# Altium PCB 核心板.PcbDoc (part 1 of 3)
Units mm, origin at the board's own origin, x right, y up, seen from the top; angles counter-clockwise.
Board outline 93.66 x 72.54 mm, 2 copper layers (Top Layer, Bottom Layer); 96 components, 149 nets, 537 pads, 213 vias.
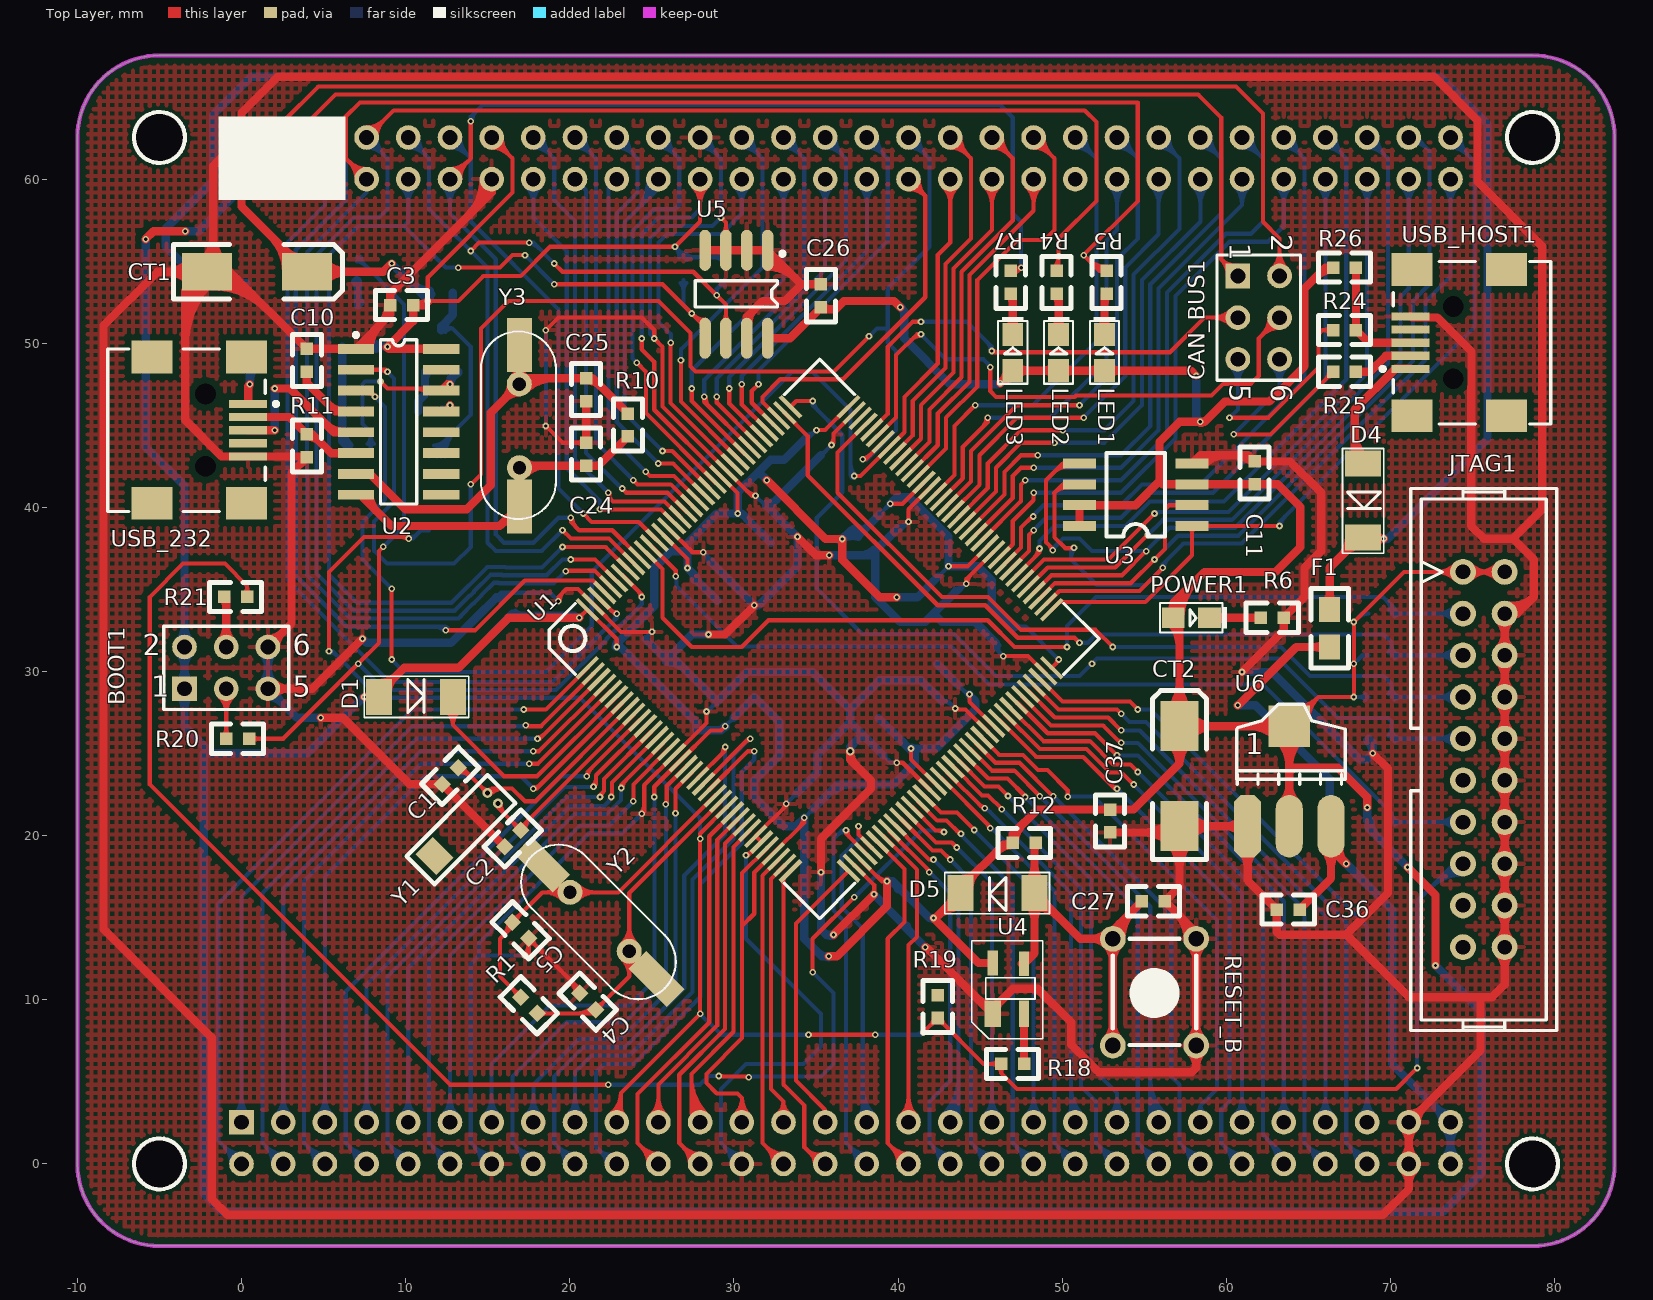
[diagram p0: Top Layer view]
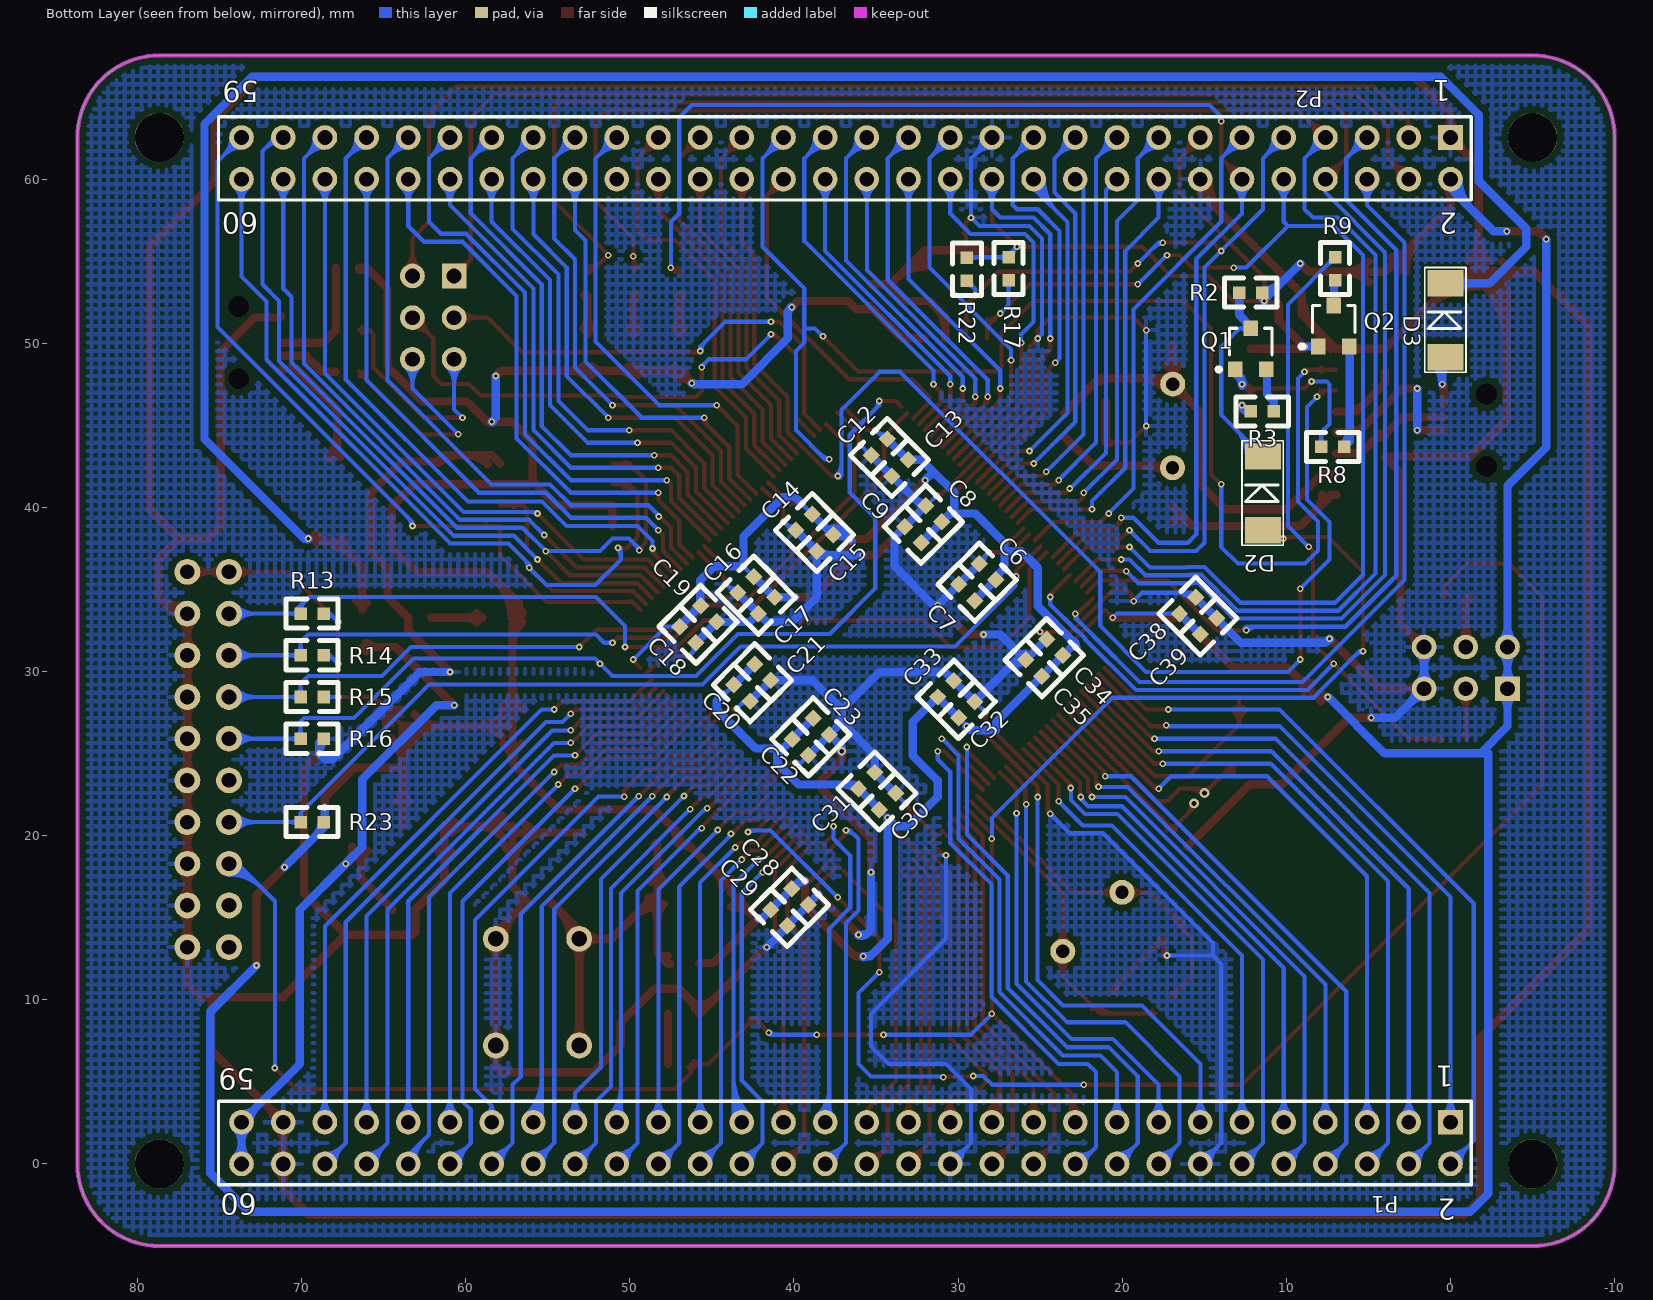
[diagram p1: Bottom Layer view, seen from below]

## Layer stack, top to bottom
Top Layer: signal copper 0.0356
Dielectric: dielectric 0.32, FR-4, Dk 4.8
Bottom Layer: signal copper 0.0356

## Board outline
-10,0 ccw(c-5,0) -5,-5 78.66,-5 ccw(c78.66,0) 83.66,0 83.66,62.54 ccw(c78.66,62.54) 78.66,67.54 -5,67.54 ccw(c-5,62.54) -10,62.54

## Design rules (kind name [scope] priority, off if disabled: settings)
Clearance Clearance_1 [Inpolygon] p1: gap=0.381
Clearance [All] p2: gap=0.229
HoleSize [All] p1: absolutevalues=TRUE maxlimit=5 minlimit=0.025 maxpercent=80.000 minpercent=20.000
MinimumSolderMaskSliver [All] p1: minsoldermaskwidth=0
PolygonConnect [All] p1: connectstyle=Relief reliefconductorwidth=0.254 reliefentries=4 polygonreliefangle="90 Angle"
RoutingVias [All] p1: holewidth=0.203 width=0.406 viastyle="Through Hole" minholewidth=0.203 minwidth=0.406 maxholewidth=0.203 maxwidth=0.406
SilkToSilkClearance [All] p1: silktosilkclearance=0
SilkscreenOverComponentPads [All] p1: minsilkscreentomaskgap=0
SolderMaskExpansion [All] p1: expansion=0.102
TestPointUsage [All] p1: valid=0 allowmultiple=FALSE
Testpoint [All] p1: side=3 testpointundercomponent=TRUE minsize=1.016 maxsize=2.54 preferedsize=1.524 minholesize=0 maxholesize=1.016 preferedholesize=0.813 testpointgrid=0.025 style=297 order=0123456789
Width [All] p1: maxlimit=1 minlimit=0.254 preferedwidth=0.254
20 further rules are at their usual default settings.

## Components (designator, comment, footprint, x,y, rotation, side; value= is the part's Value field where it differs from the comment)
BOOT1 "Header 3X2" HDR2X3 -3.472,28.956 r0 top
C1 "贴片电容10pF" 0603 13.208,24.13 r225 top
C2 "贴片电容10pF" 0603 17.018,20.32 r225 top
C3 "电容(贴片)" 0603 9.06,52.324 r0 top
C4 "贴片电容22pF" 0603 21.59,9.398 r135 top
C5 "贴片电容22pF" 0603 16.51,14.732 r315 top
C6 "贴片电容 1uF" 0603 28.702,36.576 r225 bottom
C7 "贴片电容10nF" 0603 29.972,35.306 r225 bottom
C8 "贴片电容10nF" 0603 30.988,39.116 r45 bottom
C9 "贴片电容 1uF" 0603 32.258,37.846 r45 bottom
C10 "电容(贴片)" 0603 3.98,48.26 r90 top
C11 "电容(贴片)" 0603 61.722,41.402 r90 top
C12 "电容(贴片)" 0603 35.306,43.18 r135 bottom
C13 "电容(贴片)" 0603 34.036,41.91 r135 bottom
C14 "电容(贴片)" 0603 39.878,38.608 r135 bottom
C15 "电容(贴片)" 0603 38.608,37.338 r135 bottom
C16 "电容(贴片)" 0603 43.434,34.798 r135 bottom
C17 "电容(贴片)" 0603 42.164,33.528 r135 bottom
C18 "电容(贴片)" 0603 45.974,31.75 r45 bottom
C19 "电容(贴片)" 0603 44.704,33.02 r45 bottom
C20 "电容(贴片)" 0603 42.672,28.194 r45 bottom
C21 "电容(贴片)" 0603 41.402,29.464 r45 bottom
C22 "电容(贴片)" 0603 39.116,24.892 r45 bottom
C23 "电容(贴片)" 0603 37.846,26.162 r45 bottom
C24 "电容(贴片)" 0603 20.998,43.942 r270 top
C25 "电容(贴片)" 0603 20.998,46.482 r90 top
C26 "电容(贴片)" 0603 35.306,53.594 r270 top
C27 "电容(贴片)" 0603 54.864,16.002 r0 top
C28 "电容(贴片)" 0603 40.132,16.764 r225 bottom
C29 "电容(贴片)" 0603 41.402,15.494 r225 bottom
C30 "电容(贴片)" 0603 34.798,21.59 r135 bottom
C31 "电容(贴片)" 0603 36.068,22.86 r135 bottom
C32 "电容(贴片)" 0603 29.972,27.178 r135 bottom
C33 "电容(贴片)" 0603 31.242,28.448 r135 bottom
C34 "电容(贴片)" 0603 23.622,30.988 r45 bottom
C35 "电容(贴片)" 0603 24.892,29.718 r45 bottom
C36 "电容(贴片)" 0603 63.076,15.494 r0 top
C37 "电容(贴片)" 0603 52.916,21.59 r270 top
C38 "电容(贴片)" 0603 16.51,33.528 r135 bottom
C39 "电容(贴片)" 0603 15.24,32.258 r135 bottom
CAN_BUS1 "Header 3X2" HDR2X3 60.706,54.102 r270 top
CT1 "钽电容(贴片)" 6032 3.98,54.356 r0 top
CT2 "钽电容(贴片)" 6032 57.15,26.67 r90 top
D1 "二极管(贴片)" D1206 8.382,28.448 r0 top
D2 "二极管(贴片)" D1206 11.43,38.608 r90 bottom
D3 "二极管(贴片)" D1206 0.3,49.154 r90 bottom
D4 "二极管(贴片)" D1206 68.326,42.672 r270 top
D5 "二极管(贴片)" D1206 48.312,16.51 r180 top
F1 "0.5A" 0805 66.294,31.496 r90 top
JTAG1 "JTAG" JTAG_20 75.692,24.638 r270 top
LED1 "二极管(贴片发光绿色)" LED-0805 52.705,48.311 r90 top
LED2 "二极管(贴片发光绿色)" LED-0805 49.911,48.311 r90 top
LED3 "二极管(贴片发光绿色)" LED-0805 47.117,48.311 r90 top
P1 "Header 30X2" HDR2X30 0,2.54 r0 bottom
P2 "Header 30X2" HDR2X30 0,62.54 r0 bottom
POWER1 "二极管(贴片发光绿色)" LED-0805 56.744,33.147 r0 top
Q1 "S8050" sot-23 12.168,49.657 r180 bottom
Q2 "S8550" sot-23 7.112,51.054 r180 bottom
R1 "贴片电阻 1M" 0603 17.018,10.16 r315 top
R2 "电阻(贴片)" 0603 12.87,53.086 r180 bottom
R3 "电阻(贴片)" 0603 12.168,45.847 r180 bottom
R4 "电阻(贴片)" 0603 49.657,54.407 r270 top
R5 "电阻(贴片)" 0603 52.705,54.407 r270 top
R6 "电阻(贴片)" 0603 63.5,33.274 r180 top
R7 "电阻(贴片)" 0603 46.863,54.407 r270 top
R8 "电阻(贴片)" 0603 7.874,43.688 r180 bottom
R9 "电阻(贴片)" 0603 7.028,53.848 r90 bottom
R10 "电阻(贴片)" 0603 23.538,45.72 r270 top
R11 "电阻(贴片)" 0603 3.98,44.45 r270 top
R12 "电阻(贴片)" 0603 46.99,19.558 r0 top
R13 "电阻(贴片)" 0603 68.664,33.528 r0 bottom
R14 "电阻(贴片)" 0603 68.664,30.988 r0 bottom
R15 "电阻(贴片)" 0603 68.664,28.448 r0 bottom
R16 "电阻(贴片)" 0603 68.664,25.908 r0 bottom
R17 "电阻(贴片)" 0603 26.924,53.848 r90 bottom
R18 "电阻(贴片)" 0603 46.28,6.096 r0 top
R19 "电阻(贴片)" 0603 42.418,8.89 r90 top
R20 "电阻(贴片)" 0603 -0.932,25.908 r0 top
R21 "电阻(贴片)" 0603 0.338,34.544 r180 top
R22 "电阻(贴片)" 0603 29.464,53.81 r90 bottom
R23 "电阻(贴片)" 0603 68.664,20.828 r0 bottom
R24 "电阻(贴片)" 0603 67.902,50.8 r180 top
R25 "电阻(贴片)" 0603 67.902,48.26 r180 top
R26 "电阻(贴片)" 0603 67.902,54.61 r180 top
RESET_B "KEY_M" KEY_M 58.166,13.716 r270 top
U1 "STM32F103ZET6" LQFP144 21.082,30.226 r45 top
U2 "CH340G" SOP16M 9.568,45.212 r270 top
U3 "W25Q128" SOIC-8 57.912,38.862 r180 top
U4 "集成电路贴片" MAX811T 45.772,9.144 r90 top
U5 "集成电路贴片" SOP8 32.004,55.626 r270 top
U6 "AMS1117-3.3" AMS1117 61.298,20.574 r0 top
USB_232 "USB" USB/SM0.8-6H5 -7.45,44.704 r180 top
USB_HOST1 "USB" USB/SM0.8-6H5 79.078,50.038 r0 top
Y1 "晶体(贴片)" 32.768khz 14.986,22.606 r225 top
Y2 "晶体(贴片)" CRYSTAL_SMD 23.622,12.954 r45 top
Y3 "晶体(贴片)" CRYSTAL_SMD 16.934,42.418 r0 top

## Footprints (in the part's own frame and the unit in brackets; to place one, negate y for a bottom-side part, rotate by r counter-clockwise, add the part's x,y. Pads: shape width x height; smd on the part's side, far side on the other; paste and mask are expansions set on the pad)
32.768khz [mm]
  round 0.6 hole 0.3: 1(0,0) 2(0,0.9)
  rect 1.5x1.8 smd: 3(5,0.45)
  silkscreen extent -0.76,-0.76 6.22,1.65
0603 [mil]
  rect 30x30 smd: 1(0,0) 2(55,0)
  silkscreen extent -35,-35 90,35
0805 [mil]
  rect 60x50 smd: 1(0,-0.06) 2(90,-0.06)
  silkscreen extent -50,-45 140,45
6032 [mil]
  rect 120x90 smd: 1(0,0) 2(-240,0)
  silkscreen extent -320,-65 85,65
AMS1117 [mil]
  oct 65x150 smd: 1(0.03,-0.06)
  oval 65x150 smd: 2(100.03,-0.06) 3(200.03,-0.06)
  rect 100x100 smd: 4(100.03,239.94)
  silkscreen extent -26,100 234,293
CRYSTAL_SMD [mil]
  rect 60x130 smd: 1(-0.46,-93.11) 2(-0.46,294.61)
  round 60 hole 32: 1(0,0) 2(-0.43,200.43)
  silkscreen extent -93,-123 88,327
D1206 [mm]
  rect 1.6x2.2 smd: 1(0,0) 2(4.5,0)
  silkscreen extent -0.91,-1.24 5.46,1.27
HDR2X3 [mm] "Connector; Header; 3x2 Position"
  rect 1.5x1.5 hole 0.9: 1(0,0)
  round 1.5 hole 0.9: 2(0,2.54) 3(2.54,0) 4(2.54,2.54) 5(5.08,0) 6(5.08,2.54)
  silkscreen extent -1.27,-1.27 6.35,3.81
HDR2X30 [mm] "Connector; Header; 30x2 Position"
  rect 1.5x1.5 hole 0.9: 1(0,0)
  round 1.5 hole 0.9: 2(0,2.54) 3(2.54,0) 4(2.54,2.54) 5(5.08,0) 6(5.08,2.54) 7(7.62,0) 8(7.62,2.54) 9(10.16,0) 10(10.16,2.54) 11(12.7,0) 12(12.7,2.54) 13(15.24,0) 14(15.24,2.54) 15(17.78,0) 16(17.78,2.54) 17(20.32,0) 18(20.32,2.54) 19(22.86,0) 20(22.86,2.54) 21(25.4,0) 22(25.4,2.54) 23(27.94,0) 24(27.94,2.54) 25(30.48,0) 26(30.48,2.54) 27(33.02,0) 28(33.02,2.54) 29(35.56,0) 30(35.56,2.54) 31(38.1,0) 32(38.1,2.54) 33(40.64,0) 34(40.64,2.54) 35(43.18,0) 36(43.18,2.54) 37(45.72,0) 38(45.72,2.54) 39(48.26,0) 40(48.26,2.54) 41(50.8,0) 42(50.8,2.54) 43(53.34,0) 44(53.34,2.54) 45(55.88,0) 46(55.88,2.54) 47(58.42,0) 48(58.42,2.54) 49(60.96,0) 50(60.96,2.54) 51(63.5,0) 52(63.5,2.54) 53(66.04,0) 54(66.04,2.54) 55(68.58,0) 56(68.58,2.54) 57(71.12,0) 58(71.12,2.54) 59(73.66,0) 60(73.66,2.54)
  silkscreen extent -1.27,-1.27 75.06,3.81
JTAG_20 [mil]
  round 62 hole 35: 1(-450,-50) 2(-450,50) 3(-350,-50) 4(-350,50) 5(-250,-50) 6(-250,50) 7(-150,-50) 8(-150,50) 9(-50,-50) 10(-50,50) 11(50,-50) 12(50,50) 13(150,-50) 14(150,50) 15(250,-50) 16(250,50) 17(350,-50) 18(350,50) 19(450,-50) 20(450,50)
  silkscreen extent -650,-175 650,175
KEY_M [mil]
  round 62 hole 38: 1(0,0) 1(255.91,0) 2(0,-200) 2(255.91,-200)
  silkscreen extent 0,-200 255,0
LED-0805 [mil]
  rect 55.12x50 smd: 1(0.99,5) 2(88,5)
  silkscreen extent -31,-30 130,40
LQFP144 [mm]
  rect 1.8x0.254 smd: 1(-0.009,0.001) 2(-0.009,-0.499) 3(-0.009,-0.999) 4(-0.009,-1.499) 5(-0.009,-1.999) 6(-0.009,-2.499) 7(-0.009,-2.999) 8(-0.009,-3.499) 9(-0.009,-3.999) 10(-0.009,-4.499) 11(-0.009,-4.999) 12(-0.009,-5.499) 13(-0.009,-5.999) 14(-0.009,-6.499) 15(-0.009,-6.999) 16(-0.009,-7.499) 17(-0.009,-7.999) 18(-0.009,-8.499) 19(-0.009,-8.999) 20(-0.009,-9.499) 21(-0.009,-9.999) 22(-0.009,-10.499) 23(-0.009,-10.999) 24(-0.009,-11.499) 25(-0.009,-11.999) 26(-0.009,-12.499) 27(-0.009,-12.999) 28(-0.009,-13.499) 29(-0.009,-13.999) 30(-0.009,-14.499) 31(-0.009,-14.999) 32(-0.009,-15.499) 33(-0.009,-15.999) 34(-0.009,-16.499) 35(-0.009,-16.999) 36(-0.009,-17.499) 73(22.491,-17.499) 74(22.491,-16.999) 75(22.491,-16.499) 76(22.491,-15.999) 77(22.491,-15.499) 78(22.491,-14.999) 79(22.491,-14.499) 80(22.491,-13.999) 81(22.491,-13.499) 82(22.491,-12.999) 83(22.491,-12.499) 84(22.491,-11.999) 85(22.491,-11.499) 86(22.491,-10.999) 87(22.491,-10.499) 88(22.491,-9.999) 89(22.491,-9.499) 90(22.491,-8.999) 91(22.491,-8.499) 92(22.491,-7.999) 93(22.491,-7.499) 94(22.491,-6.999) 95(22.491,-6.499) 96(22.491,-5.999) 97(22.491,-5.499) 98(22.491,-4.999) 99(22.491,-4.499) 100(22.491,-3.999) 101(22.491,-3.499) 102(22.491,-2.999) 103(22.491,-2.499) 104(22.491,-1.999) 105(22.491,-1.499) 106(22.491,-0.999) 107(22.491,-0.499) 108(22.491,0.001)
  rect 0.254x1.8 smd: 37(2.491,-19.999) 38(2.991,-19.999) 39(3.491,-19.999) 40(3.991,-19.999) 41(4.491,-19.999) 42(4.991,-19.999) 43(5.491,-19.999) 44(5.991,-19.999) 45(6.491,-19.999) 46(6.991,-19.999) 47(7.491,-19.999) 48(7.991,-19.999) 49(8.491,-19.999) 50(8.991,-19.999) 51(9.491,-19.999) 52(9.991,-19.999) 53(10.491,-19.999) 54(10.991,-19.999) 55(11.491,-19.999) 56(11.991,-19.999) 57(12.491,-19.999) 58(12.991,-19.999) 59(13.491,-19.999) 60(13.991,-19.999) 61(14.491,-19.999) 62(14.991,-19.999) 63(15.491,-19.999) 64(15.991,-19.999) 65(16.491,-19.999) 66(16.991,-19.999) 67(17.491,-19.999) 68(17.991,-19.999) 69(18.491,-19.999) 70(18.991,-19.999) 71(19.491,-19.999) 72(19.991,-19.999) 109(19.991,2.501) 110(19.491,2.501) 111(18.991,2.501) 112(18.491,2.501) 113(17.991,2.501) 114(17.491,2.501) 115(16.991,2.501) 116(16.491,2.501) 117(15.991,2.501) 118(15.491,2.501) 119(14.991,2.501) 120(14.491,2.501) 121(13.991,2.501) 122(13.491,2.501) 123(12.991,2.501) 124(12.491,2.501) 125(11.991,2.501) 126(11.491,2.501) 127(10.991,2.501) 128(10.491,2.501) 129(9.991,2.501) 130(9.491,2.501) 131(8.991,2.501) 132(8.491,2.501) 133(7.991,2.501) 134(7.491,2.501) 135(6.991,2.501) 136(6.491,2.501) 137(5.991,2.501) 138(5.491,2.501) 139(4.991,2.501) 140(4.491,2.501) 141(3.991,2.501) 142(3.491,2.501) 143(2.991,2.501) 144(2.491,2.501)
  silkscreen extent -0.81,-20.8 23.29,3.3
MAX811T [mil]
  rect 63x40 smd: 1(0,0)
  rect 63x25 smd: 2(0,-75)
  rect 59.05x25 smd: 3(120,-75) 4(122.05,0)
  silkscreen extent -60,-120 175,50
SOIC-8 [mil]
  rect 80x24 smd: 1(0,0) 2(0,-50.06) 3(0,-100.06) 4(0,-150.06) 5(270,-150) 6(270,-100) 7(270,-50) 8(270,0)
  silkscreen extent 65,-175 205,25
SOP8 [mm]
  oval 2.5x0.7 smd: 1(-0.037,0.051) 2(-0.037,-1.219) 3(-0.037,-2.489) 4(-0.037,-3.759) 5(5.32,-3.759) 6(5.32,-2.489) 7(5.32,-1.219) 8(5.32,0.051)
  silkscreen extent 0.04,-4.35 3.42,1.08
SOP16M [mm]
  rect 0.6x2.2 smd: 1(-4.445,-2.6) 2(-3.175,-2.6) 3(-1.905,-2.6) 4(-0.635,-2.6) 5(0.635,-2.6) 6(1.905,-2.6) 7(3.175,-2.6) 8(4.445,-2.6) 9(4.445,2.6) 10(3.175,2.6) 11(1.905,2.6) 12(0.635,2.6) 13(-0.635,2.6) 14(-1.905,2.6) 15(-3.175,2.6) 16(-4.445,2.6)
  silkscreen extent -5.42,-2.72 5,1.1
sot-23 [mm] "SOT-23; 3 Leads; Body 3.0 x 2.6 mm, inc. leads (LxW max)"
  rect 0.9x0.95 smd: 1(-0.95,-1.25) 2(0.95,-1.25) 3(0,1.25)
  silkscreen extent -2.08,-1.37 1.3,1.25
USB/SM0.8-6H5 [mm]
  rect 2.3x0.5 smd: 1(-7.85,-1.6) 2(-7.85,-0.8) 3(-7.85,0) 4(-7.85,0.8) 5(-7.85,1.6)
  rect 2.5x2 smd: 6(-7.75,4.45) 7(-1.996,4.45) 8(-7.75,-4.45) 9(-1.996,-4.45)
  round 0.6 hole 1.27 unplated: MH1(-5.25,2.2) MH2(-5.25,-2.2)
  silkscreen extent -9.68,-4.95 0.7,4.95

## Part data
BOOT1 CAN_BUS1: "Header, 3-Pin, Dual row"
C1 C2: library part Cap, "Capacitor 10pF"
C3 C10 C11 C12 C13 C14 C15 C16 C17 C18 C19 C20 C21 C22 C23 C28 C29 C30 C31 C32 C33 C34 C35 C36 C37 C38 C39: library part "CAP_0.1uF X7R 0603", "0603X7R104J160NT(0.1uF)"
C4 C5: library part Cap, "Capacitor 22pF"
C6 C9: library part Cap, "Capacitor 10uf"
C7 C8: library part Cap, "Capacitor 0.1uf"
C24 C25: library part "CAP_33pF COG 0603", "0603COG330J500NT(33pF)"
C26 C27: library part "CAP_10uF/10V Z5U 0603", "0603Z5U106J100NT(10uF/10V)"
CT1 CT2: library part "CAP TAN 100uF/10V/6032", "100uF/10V/6032封装"
D1 D2 D3 D4 D5: library part "DIODE 1N4148/1206", "1N4148/1206"
F1: library part "Fuse 1", "Fuse"
LED1 LED2 LED3 POWER1: library part "LED_GREEN 0805", "LED-0805"
P1 P2: "Header, 30-Pin, Dual row"
Q1: library part 2N3904, "NPN General Purpose Amplifier"
Q2: library part 2N3906, "PNP General Purpose Amplifier"
R1: library part Res3, "电阻"
R2 R3 R8 R9 R10 R11: library part "RES_1MΩ 5% 0603", "RS-03K-105±5%(1MΩ)"
R4 R5 R6 R7 R19 R24 R25 R26: library part "RES_1K  5% 0603", "RS-03K-102±5%(1KΩ)"
R12 R13 R14 R15 R16 R20 R21 R23: library part "RES_10K 5% 0603", "RS-03K-103±5%(10KΩ)"
R17 R22: library part "RES_1.5K  5% 0603", "RS-03K-152±5%(1.5KΩ)"
R18: library part "RES_470 5% 0603", "RS-03K-471±5%(470Ω)"
U2: "USB2UART"
U3: library part W25X16, "W25X16;SST25VF016;MX25L1605"
U4: library part "Power MAX811T", "MAX811T/SOT143  电源管理芯片"
U5: library part AT24C02A, "AT24C02/SOP08"
U6: library part AMS1117
USB_232 USB_HOST1: library part USB5
Y1: library part "CRYSTAL 12M HC-49SMD", "HC-49SMD/XTAL 32.768KHz"
Y2: library part "CRYSTAL 12M HC-49SMD", "HC-49SMD/8.000MHz"
Y3: library part "CRYSTAL 12M HC-49SMD", "HC-49SMD/12.000MHz"

## Free pads (board coordinates)
  round 3 hole 3: 0(-5,0) 0(-5,62.54) 0(78.66,0) 0(78.66,62.54)

## Via types
v1: diameter 0.406, hole 0.203, Top Layer to Bottom Layer, 212 vias
v2: diameter 0.508, hole 0.254, Top Layer to Bottom Layer, 1 vias

## Nets (pads, with @x,y where several pads share a name; then routed paths per layer and width w, separated by ;. In a path a pad name is that pad's centre, name@x,y a point inside that pad or via, vN(x,y) a via of type N, cw(c..) or ccw(c..) an arc to the next point about the centre after c; other vN are vias at no path point)
BOOT0: R9.2 R20.2 U1.138 | length 60.4
  Top Layer w0.254: R20.2@0.465,25.908 2.54,25.908 v1(7.112,30.48) 8.382,31.75 8.382,37.338 v1(8.638,37.594) ; R20.2@0.645,25.728 cw(c1.078,25.295) 1.078,25.908 cw(c1.078,26.521) R20.2@0.645,26.088 ; U1.138@23.197,35.877 24.384,34.689 v1(24.384,34.544) ; 24.151,34.922 cw(c23.773,34.544) v1@24.308,34.544
  Bottom Layer w0.254: R9.2@7.028,54.991 cw(c7.028,54.378) 7.462,54.811 cw(c7.895,55.245) R9.2@7.282,55.245 ; R9.2@7.028,55.245 9.906,52.367 9.906,38.862 v1(8.638,37.594) ; v1(7.112,30.48) 8.712,28.88 19.168,28.88 22.25,31.962 22.25,32.003 22.7,32.452 22.74,32.452 24.384,34.096 v1(24.384,34.544)
BOOT1: R21.1 U1.48 | length 93.5
  Top Layer w0.254: R21.1@0.158,34.724 ccw(c-0.275,35.157) 0.338,35.157 ccw(c0.951,35.157) R21.1@0.518,34.724 ; R21.1@0.338,34.544 0.338,35.222 -1.016,36.576 -3.556,36.576 -5.588,34.544 -5.588,23.114 12.7,4.826 v1(22.352,4.826) ; v1(29.083,5.359) 29.108,5.334 30.861,5.334 v1(30.912,5.283) ; v1@29.137,5.413 ccw(c29.328,5.605) 29.328,5.334 ; 30.605,5.334 cw(c30.605,4.977) v1@30.858,5.229 ; v1(34.798,11.684) 34.798,13.716 v1(37.338,16.256) ; U1.48@40.874,21.735 42.289,20.32 42.697,20.32 v1(42.799,20.218) ; 42.37,20.32 cw(c42.37,19.789) v1@42.745,20.165
  Bottom Layer w0.254: v1(22.352,4.826) 27.94,4.826 28.473,5.359 v1(29.083,5.359) ; v1(30.912,5.283) 30.963,5.334 35.306,5.334 36.068,6.096 36.068,10.414 v1(34.798,11.684) ; v1@30.966,5.229 cw(c31.218,4.977) 31.218,5.334 ; v1(37.338,16.256) 37.363,16.256 41.427,20.32 42.697,20.32 v1(42.799,20.218) ; v1@37.338,16.332 ccw(c37.338,16.577) 37.511,16.404 ; 42.37,20.32 cw(c42.37,19.789) v1@42.745,20.165
CAN_RX: CAN_BUS1.2 P2.3 | length 77.3
  Top Layer w0.254: P2.3@2.286,63.109 ccw(c2.112,63.5) 2.54,63.5 ; P2.3@2.54,62.54 2.54,63.5 ; P2.3@2.794,63.109 cw(c2.968,63.5) 2.54,63.5 ; CAN_BUS1.2@62.805,54.543 ccw(c61.742,55.606) 63.246,55.606 ccw(c64.75,55.606) CAN_BUS1.2@63.687,54.543 ; CAN_BUS1.2@62.985,54.363 ccw(c62.355,54.993) 63.246,54.993 ccw(c64.137,54.993) CAN_BUS1.2@63.507,54.363 ; CAN_BUS1.2@63.246,54.102 63.246,56.388 62.23,57.404 62.23,64.008 60.599,65.639 4.679,65.639 2.54,63.5
CAN_TX: CAN_BUS1.1 P2.4 | length 78.4
  Top Layer w0.254: P2.4@2.54,60 3.81,61.27 3.81,63.246 5.72,65.156 58.288,65.156 59.69,63.754 59.69,55.118 ; P2.4@2.54,60.369 ccw(c2.54,61.26) 3.17,60.63 ccw(c3.8,60) P2.4@2.909,60 ; P2.4@2.54,60.623 ccw(c2.54,62.127) 3.604,61.064 ccw(c4.667,60) P2.4@3.163,60 ; CAN_BUS1.1@60.083,54.122 ccw(c58.739,54.167) 59.69,55.118 ; CAN_BUS1.1@60.337,54.114 ccw(c59.541,54.14) 60.104,54.704 ccw(c60.668,55.267) CAN_BUS1.1@60.694,54.471 ; CAN_BUS1.1@60.686,54.725 cw(c60.641,56.069) 59.69,55.118 ; CAN_BUS1.1@60.706,54.102 59.69,55.118
CH0: P1.28 U1.34 | length 23.3
  Top Layer w0.254: P1.28@32.397,0 ccw(c30.893,0) 31.956,1.064 ccw(c33.02,2.127) P1.28@33.02,0.623 ; P1.28@32.651,0 ccw(c31.76,0) 32.39,0.63 ccw(c33.02,1.26) P1.28@33.02,0.369 ; U1.34@32.742,18.553 31.75,17.56 31.75,1.27 P1.28@33.02,0
CH1: P1.27 U1.35 | length 18.1
  Top Layer w0.254: P1.27@32.643,3.036 ccw(c32.066,3.796) 33.02,3.796 ; P1.27@33.02,2.54 33.02,3.796 ; U1.35@33.096,18.199 32.258,17.361 32.258,4.558 33.02,3.796 ; P1.27@33.397,3.036 cw(c33.974,3.796) 33.02,3.796
CH2: P1.30 U1.36 | length 22.1
  Top Layer w0.254: U1.36@32.903,17.299 cw(c32.62,17.017) 33.02,17.017 ; U1.36@33.45,17.846 33.02,17.416 33.02,4.826 34.29,3.556 34.29,1.016 35.306,0 P1.30@35.56,0 ; 34.417,0.889 ccw(c35.17,1.642) P1.30@35.416,0.606 ; 34.676,0.63 cw(c34.046,0) P1.30@34.937,0 ; 34.739,0.567 ccw(c35.293,1.122) P1.30@35.475,0.359
CH3: P1.29 U1.37 | length 17.4
  Top Layer w0.254: P1.29@35.56,2.54 35.56,3.302 33.782,5.08 33.782,14.643 U1.37@36.985,17.846
CH4: P1.36 U1.44 | length 26.9
  Top Layer w0.254: U1.44@39.46,20.321 39.46,20.296 41.91,17.846 v1(41.91,17.78) ; 41.733,18.023 cw(c41.491,17.78) v1@41.834,17.78
  Bottom Layer w0.254: v1(41.91,17.78) 43.18,16.51 43.18,5.08 41.91,3.81 41.91,1.27 P1.36@43.18,0 ; P1.36@42.557,0 ccw(c41.053,0) 42.116,1.064 ccw(c43.18,2.127) P1.36@43.18,0.623 ; P1.36@42.811,0 ccw(c41.92,0) 42.55,0.63 ccw(c43.18,1.26) P1.36@43.18,0.369
CH5: P1.35 U1.45 | length 27.4
  Top Layer w0.254: U1.45@39.814,20.674 39.814,20.65 40.542,19.921 40.542,19.897 41.896,18.542 v1(42.164,18.542)
  Bottom Layer w0.254: v1(42.164,18.542) 43.688,17.018 43.688,16.51 43.688,3.048 P1.35@43.18,2.54 ; P1.35@42.739,2.981 ccw(c40.45,5.27) 43.688,5.27 ; P1.35@42.919,2.801 ccw(c41.063,4.657) 43.688,4.657 ; P1.35@43.099,2.621 ccw(c41.676,4.044) 43.688,4.044 ; P1.35@43.278,2.442 ccw(c42.289,3.431) 43.688,3.431
CH6: P1.34 U1.42 | length 25
  Top Layer w0.254: U1.42@38.753,19.613 40.394,17.972 40.394,14.74 39.37,13.716 39.37,1.27 P1.34@40.64,0 ; P1.34@40.017,0 ccw(c38.513,0) 39.576,1.064 ccw(c40.64,2.127) P1.34@40.64,0.623 ; P1.34@40.271,0 ccw(c39.38,0) 40.01,0.63 ccw(c40.64,1.26) P1.34@40.64,0.369
CH7: P1.33 U1.43 | length 22.2
  Top Layer w0.254: U1.43@39.106,19.967 41.148,17.925 41.148,13.836 40.64,13.328 P1.33@40.64,2.54 ; P1.33@40.199,2.981 ccw(c39.136,4.044) 40.64,4.044 ccw(c42.144,4.044) P1.33@41.081,2.981 ; P1.33@40.379,2.801 ccw(c39.749,3.431) 40.64,3.431 ccw(c41.531,3.431) P1.33@40.901,2.801
CH8: P1.38 U1.46 | length 27.4
  Top Layer w0.254: U1.46@40.167,21.028 42.094,19.101 42.621,19.101 v1(43.18,18.542)
  Bottom Layer w0.254: v1(43.18,18.542) 44.45,17.272 44.45,1.27 P1.38@45.72,0 ; P1.38@45.097,0 ccw(c43.593,0) 44.656,1.064 ccw(c45.72,2.127) P1.38@45.72,0.623 ; P1.38@45.351,0 ccw(c44.46,0) 45.09,0.63 ccw(c45.72,1.26) P1.38@45.72,0.369
CH9: P1.37 U1.47 | length 25.3
  Top Layer w0.254: U1.47@40.521,21.381 42.318,19.583 43.272,19.583 v1(43.577,19.278)
  Bottom Layer w0.254: v1(43.577,19.278) 45.72,17.135 45.72,9.144 P1.37@45.72,2.54 ; P1.37@45.279,2.981 ccw(c44.216,4.044) 45.72,4.044 ccw(c47.224,4.044) P1.37@46.161,2.981 ; P1.37@45.459,2.801 ccw(c44.829,3.431) 45.72,3.431 ccw(c46.611,3.431) P1.37@45.981,2.801
CH10: P1.22 U1.26 | length 28.1
  Top Layer w0.254: P1.22@24.777,0 ccw(c23.273,0) 24.336,1.064 ccw(c25.4,2.127) P1.22@25.4,0.623 ; P1.22@25.031,0 ccw(c24.14,0) 24.77,0.63 ccw(c25.4,1.26) P1.22@25.4,0.369 ; P1.22@25.4,0 24.13,1.27 24.13,4.257 28.499,8.626 28.499,19.966 U1.26@29.914,21.381
CH11: P1.21 U1.27 | length 24.3
  Top Layer w0.254: P1.21@24.959,2.981 ccw(c23.896,4.044) 25.4,4.044 ccw(c26.904,4.044) P1.21@25.841,2.981 ; P1.21@25.139,2.801 ccw(c24.509,3.431) 25.4,3.431 ccw(c26.291,3.431) P1.21@25.661,2.801 ; P1.21@25.4,2.54 25.4,4.845 28.981,8.426 28.981,19.742 U1.27@30.268,21.028
CH12: P1.24 U1.28 | length 26.6
  Top Layer w0.254: P1.24@27.317,0 ccw(c25.813,0) 26.876,1.064 ccw(c27.94,2.127) P1.24@27.94,0.623 ; P1.24@27.571,0 ccw(c26.68,0) 27.31,0.63 ccw(c27.94,1.26) P1.24@27.94,0.369 ; P1.24@27.94,0 26.67,1.27 26.67,5.432 29.464,8.226 29.464,19.517 U1.28@30.621,20.674
CH13: P1.23 U1.29 | length 27
  Top Layer w0.254: 27.407,3.492 ccw(c28.892,3.492) P1.23@27.842,2.442 ; 27.407,4.105 ccw(c29.505,4.105) P1.23@28.021,2.621 ; 27.407,4.719 ccw(c30.119,4.719) P1.23@28.201,2.801 ; 27.407,5.332 ccw(c30.732,5.332) P1.23@28.381,2.981 ; P1.23@27.94,2.54 27.407,3.073 27.407,5.486 29.972,8.052 29.972,19.318 U1.29@30.975,20.321
DAC_OUT1: P1.32 U1.40 | length 28.5
  Top Layer w0.254: v1(36.83,20.32) 36.83,20.122 U1.40@38.046,18.906 ; v1@36.906,20.32 ccw(c37.568,20.32) 37.1,19.852
  Bottom Layer w0.254: 36.266,20.01 cw(c36.83,19.447) v1@36.83,20.244 ; v1(36.83,20.32) 36.576,20.32 36.068,19.812 36.068,15.443 36.83,14.681 36.83,1.27 P1.32@38.1,0 ; P1.32@37.477,0 ccw(c35.973,0) 37.036,1.064 ccw(c38.1,2.127) P1.32@38.1,0.623 ; P1.32@37.731,0 ccw(c36.84,0) 37.47,0.63 ccw(c38.1,1.26) P1.32@38.1,0.369
DAC_OUT2: P1.31 U1.41 | length 25.4
  Top Layer w0.254: v1(37.592,20.574) v1(37.592,20.574) 37.591,20.068 U1.41@38.399,19.26
  Bottom Layer w0.254: v1(37.592,20.574) 37.592,19.812 36.576,18.796 36.576,15.618 37.846,14.348 37.846,2.794 P1.31@38.1,2.54 ; P1.31@37.659,2.981 ccw(c37.209,3.431) 37.846,3.431 ccw(c38.991,3.431) P1.31@38.181,2.621 ; 37.846,4.044 ccw(c39.604,4.044) P1.31@38.361,2.801 ; 37.846,4.657 ccw(c40.217,4.657) P1.31@38.541,2.981
DM9000_INT: P2.43 U1.91 | length 33.8
  Top Layer w0.254: U1.91@42.995,40.12 44.45,41.574 44.45,43.434 47.244,46.228 v1(51.054,46.228)
  Bottom Layer w0.254: v1(51.054,46.228) 53.34,48.514 53.34,55.118 54.61,56.388 54.61,61.27 P2.43@53.34,62.54 ; P2.43@53.34,61.917 cw(c53.34,60.413) 54.404,61.476 cw(c55.467,62.54) P2.43@53.963,62.54 ; P2.43@53.34,62.171 cw(c53.34,61.28) 53.97,61.91 cw(c54.6,62.54) P2.43@53.709,62.54
DM9000_RST: P2.22 U1.123 | length 27.5
  Top Layer w0.254: v1(25.654,43.434) 26.246,43.434 U1.123@28.5,41.18
  Bottom Layer w0.254: 23.938,57.974 ccw(c21.911,60) P2.22@24.777,60 ; 24.371,58.407 ccw(c22.779,60) P2.22@25.031,60 ; 24.805,58.841 ccw(c23.646,60) P2.22@25.285,60 ; P2.22@25.4,60 25.4,59.436 23.343,57.379 23.343,45.745 v1(25.654,43.434)
DTS: R3.1 U2.13 | length 2.5
  Top Layer w0.508: U2.13@12.168,45.847 12.446,45.847 12.7,46.101 v1(12.7,46.228) ccw(c13.042,46.228) U2.13@12.977,45.892
  Bottom Layer w0.508: R3.1@12.168,45.847 12.446,45.847 v1@12.7,46.101 ; R3.1@12.202,45.969 ccw(c12.338,46.463) v1@12.7,46.101 ; v1(12.7,46.228) v1@12.7,46.101
F_CS: P2.59 U1.73 U3.1 | length 52.2
  Top Layer w0.254: U1.73@49.359,33.756 49.843,34.239 55.067,34.239 57.912,37.084 U3.1@57.912,38.862 v1(63.246,38.862) ; U1.73@49.906,34.302 ccw(c50.058,34.454) 50.058,34.239 ; U3.1@57.786,38.736 cw(c57.483,38.433) 57.912,38.433 cw(c58.341,38.433) U3.1@58.038,38.736 ; U3.1@58.749,38.736 cw(c59.052,38.433) 59.052,38.862 cw(c59.052,39.291) U3.1@58.749,38.988
  Bottom Layer w0.254: v1(63.246,38.862) 63.246,39.116 75.133,51.003 75.133,61.067 P2.59@73.66,62.54 ; v1@63.322,38.862 cw(c64.119,38.862) 63.556,39.426 ; P2.59@73.66,61.917 cw(c73.66,60.413) 74.724,61.476 cw(c75.787,62.54) P2.59@74.283,62.54 ; P2.59@73.66,62.171 cw(c73.66,61.28) 74.29,61.91 cw(c74.92,62.54) P2.59@74.029,62.54
FSMC_A0: P1.8 U1.10 | length 40.2
  Top Layer w0.254: v1(21.031,23.622) 21.082,23.622 21.082,23.876 24.244,27.038 U1.10@24.257,27.038 ; v1@21.107,23.622 cw(c21.782,23.622) 21.305,24.099
  Bottom Layer w0.254: P1.8@6.997,0 ccw(c5.493,0) 6.556,1.064 ccw(c7.62,2.127) P1.8@7.62,0.623 ; P1.8@7.251,0 ccw(c6.36,0) 6.99,0.63 ccw(c7.62,1.26) P1.8@7.62,0.369 ; P1.8@7.62,0 6.35,1.27 6.35,10.516 19.456,23.622 v1(21.031,23.622)
FSMC_A1: P1.7 U1.11 | length 36.6
  Top Layer w0.254: v1@21.394,23.026 ccw(c20.882,23.538) 21.606,23.538 ; v1(21.448,22.972) 21.448,22.978 21.455,22.984 21.46,22.984 21.606,23.13 21.606,23.68 U1.11@24.611,26.685
  Bottom Layer w0.254: P1.7@7.179,2.981 ccw(c6.116,4.044) 7.62,4.044 ccw(c9.124,4.044) P1.7@8.061,2.981 ; P1.7@7.359,2.801 ccw(c6.729,3.431) 7.62,3.431 ccw(c8.511,3.431) P1.7@7.881,2.801 ; P1.7@7.62,2.54 7.62,10.922 19.67,22.972 v1(21.448,22.972)
FSMC_A2: P1.10 U1.12 | length 38.8
  Top Layer w0.254: v1(21.844,22.352) 21.844,22.466 22.089,22.711 22.089,23.456 U1.12@24.964,26.331 ; v1@21.92,22.352 cw(c22.38,22.352) 22.055,22.677
  Bottom Layer w0.254: P1.10@9.537,0 ccw(c8.033,0) 9.096,1.064 ccw(c10.16,2.127) P1.10@10.16,0.623 ; P1.10@9.791,0 ccw(c8.9,0) 9.53,0.63 ccw(c10.16,1.26) P1.10@10.16,0.369 ; P1.10@10.16,0 8.89,1.27 8.89,11.43 19.812,22.352 v1(21.844,22.352)
FSMC_A3: P1.9 U1.13 | length 35.4
  Top Layer w0.254: v1@22.466,22.406 ccw(c22.212,22.66) 22.572,22.66 ; v1@22.52,22.278 22.572,22.33 22.572,23.231 U1.13@25.318,25.977
  Bottom Layer w0.254: P1.9@9.719,2.981 ccw(c8.656,4.044) 10.16,4.044 ccw(c11.664,4.044) P1.9@10.601,2.981 ; P1.9@9.899,2.801 ccw(c9.269,3.431) 10.16,3.431 ccw(c11.051,3.431) P1.9@10.421,2.801 ; P1.9@10.16,2.54 10.16,11.938 20.015,21.793 22.075,21.793 22.403,22.121 22.403,22.167 22.511,22.276 22.518,22.276 22.52,22.278 v1(22.52,22.352) ; 22.309,22.027 ccw(c21.985,22.352) v1@22.444,22.352
FSMC_A4: P1.12 U1.14 | length 37.4
  Top Layer w0.254: v1(23.13,22.908) 23.13,23.083 U1.14@25.671,25.624 ; v1@23.207,22.908 cw(c23.814,22.908) 23.384,23.337
  Bottom Layer w0.254: P1.12@12.077,0 ccw(c10.573,0) 11.636,1.064 ccw(c12.7,2.127) P1.12@12.7,0.623 ; P1.12@12.331,0 ccw(c11.44,0) 12.07,0.63 ccw(c12.7,1.26) P1.12@12.7,0.369 ; P1.12@12.7,0 11.43,1.27 11.43,12.446 20.295,21.311 22.275,21.311 23.13,22.166 v1(23.13,22.908)
FSMC_A5: P1.11 U1.15 | length 33.1
  Top Layer w0.254: v1(23.876,22.098) 23.876,23.121 U1.15@26.025,25.27
  Bottom Layer w0.254: P1.11@12.259,2.981 ccw(c11.196,4.044) 12.7,4.044 ccw(c14.204,4.044) P1.11@13.141,2.981 ; P1.11@12.439,2.801 ccw(c11.809,3.431) 12.7,3.431 ccw(c13.591,3.431) P1.11@12.961,2.801 ; P1.11@12.7,2.54 12.7,12.7 20.625,20.625 22.403,20.625 v1(23.876,22.098)
FSMC_A6: P1.39 U1.50 | length 27.2
  Top Layer w0.254: U1.50@41.581,22.442 42.611,21.412 43.586,21.412 v1(44.653,20.345)
  Bottom Layer w0.254: v1(44.653,20.345) 44.653,20.32 48.26,16.713 P1.39@48.26,2.54 ; v1@44.729,20.345 ccw(c44.975,20.345) 44.801,20.172 ; P1.39@47.819,2.981 ccw(c46.756,4.044) 48.26,4.044 ccw(c49.764,4.044) P1.39@48.701,2.981 ; P1.39@47.999,2.801 ccw(c47.369,3.431) 48.26,3.431 ccw(c49.151,3.431) P1.39@48.521,2.801
FSMC_A7: P1.42 U1.53 | length 31.3
  Top Layer w0.254: U1.53@42.642,23.503 45.618,20.526 v1(45.618,20.447) ; 45.432,20.712 cw(c45.167,20.447) v1@45.542,20.447
  Bottom Layer w0.254: v1@45.618,20.371 cw(c45.618,19.942) 45.922,20.245 ; v1(45.618,20.447) 45.72,20.447 49.53,16.637 49.53,1.27 P1.42@50.8,0 ; P1.42@50.177,0 ccw(c48.673,0) 49.736,1.064 ccw(c50.8,2.127) P1.42@50.8,0.623 ; P1.42@50.431,0 ccw(c49.54,0) 50.17,0.63 ccw(c50.8,1.26) P1.42@50.8,0.369
FSMC_A8: P1.41 U1.54 | length 30
  Top Layer w0.254: U1.54@42.995,23.856 45.236,21.615 45.263,21.615 45.288,21.641 v1(45.288,21.666) ; 44.983,21.869 ccw(c45.288,22.175) v1@45.288,21.742
  Bottom Layer w0.254: v1@45.288,21.59 cw(c45.288,21.161) 45.592,21.464 ; v1(45.288,21.666) 45.39,21.666 50.546,16.51 50.546,2.794 P1.41@50.8,2.54 ; P1.41@50.359,2.981 ccw(c49.909,3.431) 50.546,3.431 ccw(c51.691,3.431) P1.41@50.881,2.621 ; 50.546,4.044 ccw(c52.304,4.044) P1.41@51.061,2.801 ; 50.546,4.657 ccw(c52.917,4.657) P1.41@51.241,2.981
FSMC_A9: P1.44 U1.55 | length 32.4
  Top Layer w0.254: U1.55@43.349,24.21 43.37,24.21 45.126,22.454 45.491,22.454 v1(46.33,21.615) v1@46.33,21.641
  Bottom Layer w0.254: v1(46.33,21.615) 51.156,16.789 51.156,4.724 52.07,3.81 52.07,1.27 P1.44@53.34,0 ; P1.44@52.717,0 ccw(c51.213,0) 52.276,1.064 ccw(c53.34,2.127) P1.44@53.34,0.623 ; P1.44@52.971,0 ccw(c52.08,0) 52.71,0.63 ccw(c53.34,1.26) P1.44@53.34,0.369
FSMC_A10: P1.43 U1.56 | length 30.3
  Top Layer w0.254: U1.56@43.703,24.563 45.272,22.994 46.12,22.994 v1(46.702,22.412)
  Bottom Layer w0.254: v1(46.702,22.412) 51.765,17.348 51.765,5.893 53.34,4.318 P1.43@53.34,2.54 ; P1.43@52.899,2.981 ccw(c51.836,4.044) 53.34,4.044 ccw(c54.844,4.044) P1.43@53.781,2.981 ; P1.43@53.079,2.801 ccw(c52.449,3.431) 53.34,3.431 ccw(c54.231,3.431) P1.43@53.601,2.801
FSMC_A11: P1.46 U1.57 | length 34.5
  Top Layer w0.254: U1.57@44.056,24.917 45.497,23.476 46.678,23.476 47.752,22.403 v1(47.752,22.352) ; 47.586,22.568 cw(c47.37,22.352) v1@47.676,22.352
  Bottom Layer w0.254: v1(47.752,22.352) 54.61,15.494 54.61,1.27 P1.46@55.88,0 ; P1.46@55.257,0 ccw(c53.753,0) 54.816,1.064 ccw(c55.88,2.127) P1.46@55.88,0.623 ; P1.46@55.511,0 ccw(c54.62,0) 55.25,0.63 ccw(c55.88,1.26) P1.46@55.88,0.369
FSMC_A12: P2.47 U1.87 | length 38
  Top Layer w0.254: U1.87@44.41,38.705 46.482,40.778 46.482,42.164 47.498,43.18 v1(48.514,43.18)
  Bottom Layer w0.254: v1(48.514,43.18) 53.594,43.18 55.372,44.958 55.372,53.594 59.69,57.912 59.69,61.27 P2.47@58.42,62.54 ; P2.47@58.42,61.917 cw(c58.42,60.413) 59.484,61.476 cw(c60.547,62.54) P2.47@59.043,62.54 ; P2.47@58.42,62.171 cw(c58.42,61.28) 59.05,61.91 cw(c59.68,62.54) P2.47@58.789,62.54
FSMC_A13: P2.48 U1.88 | length 33.6
  Top Layer w0.254: U1.88@44.056,39.059 45.974,40.977 45.974,42.418 47.498,43.942 v1(49.53,43.942)
  Bottom Layer w0.254: v1(49.53,43.942) 52.578,43.942 54.864,46.228 54.864,53.848 58.42,57.404 P2.48@58.42,60 ; P2.48@57.979,59.559 cw(c56.916,58.496) 58.42,58.496 cw(c59.924,58.496) P2.48@58.861,59.559 ; P2.48@58.159,59.739 cw(c57.529,59.109) 58.42,59.109 cw(c59.311,59.109) P2.48@58.681,59.739
FSMC_A14: P2.45 U1.89 | length 36
  Top Layer w0.254: U1.89@43.703,39.412 45.466,41.176 45.466,42.672 47.498,44.704 v1(50.038,44.704)
  Bottom Layer w0.254: v1(50.038,44.704) 52.578,44.704 54.356,46.482 54.356,54.178 57.15,56.972 57.15,61.27 P2.45@55.88,62.54 ; P2.45@55.88,61.917 cw(c55.88,60.413) 56.944,61.476 cw(c58.007,62.54) P2.45@56.503,62.54 ; P2.45@55.88,62.171 cw(c55.88,61.28) 56.51,61.91 cw(c57.14,62.54) P2.45@56.249,62.54
FSMC_A15: P2.46 U1.90 | length 31.6
  Top Layer w0.254: U1.90@43.349,39.766 44.958,41.375 44.958,43.18 47.244,45.466 v1(51.308,45.466)
  Bottom Layer w0.254: v1(51.308,45.466) 53.848,48.006 53.848,54.61 55.88,56.642 P2.46@55.88,60 ; P2.46@55.439,59.559 cw(c54.376,58.496) 55.88,58.496 cw(c57.384,58.496) P2.46@56.321,59.559 ; P2.46@55.619,59.739 cw(c54.989,59.109) 55.88,59.109 cw(c56.771,59.109) P2.46@56.141,59.739
FSMC_A16: P2.54 U1.80 | length 40.5
  Top Layer w0.254: U1.80@46.885,36.23 46.885,36.255 47.981,37.351 47.981,38.329 v1(48.26,38.608)
  Bottom Layer w0.254: v1(48.26,38.608) 49.022,39.37 53.594,39.37 55.118,40.894 59.182,40.894 66.04,47.752 P2.54@66.04,60 ; P2.54@65.599,59.559 cw(c64.536,58.496) 66.04,58.496 cw(c67.544,58.496) P2.54@66.481,59.559 ; P2.54@65.779,59.739 cw(c65.149,59.109) 66.04,59.109 cw(c66.931,59.109) P2.54@66.301,59.739
FSMC_A17: P2.51 U1.81 | length 43.2
  Top Layer w0.254: U1.81@46.531,36.584 47.498,37.551 47.498,38.77 48.178,39.449 v1(48.231,39.449) ; 48.009,39.281 cw(c48.231,39.059) v1@48.231,39.373
  Bottom Layer w0.254: v1(48.231,39.449) 48.231,39.494 48.87,40.132 53.594,40.132 54.864,41.402 58.42,41.402 64.77,47.752 64.77,61.27 P2.51@63.5,62.54 ; v1@48.308,39.449 cw(c48.599,39.449) 48.393,39.655 ; P2.51@63.5,61.917 cw(c63.5,60.413) 64.564,61.476 cw(c65.627,62.54) P2.51@64.123,62.54 ; P2.51@63.5,62.171 cw(c63.5,61.28) 64.13,61.91 cw(c64.76,62.54) P2.51@63.869,62.54
FSMC_A18: P2.52 U1.82 | length 38.5
  Top Layer w0.254: U1.82@46.177,36.938 46.99,37.75 46.99,39.167 48.26,40.437 v1(48.26,40.894)
  Bottom Layer w0.254: v1(48.26,40.894) 53.594,40.894 56.896,44.196 56.896,52.883 60.201,56.188 62.538,56.188 63.5,57.15 P2.52@63.5,60 ; P2.52@63.059,59.559 cw(c61.996,58.496) 63.5,58.496 cw(c65.004,58.496) P2.52@63.941,59.559 ; P2.52@63.239,59.739 cw(c62.609,59.109) 63.5,59.109 cw(c64.391,59.109) P2.52@63.761,59.739
FSMC_A19: P1.1 U1.2 | length 45.2
  Top Layer w0.254: v1(17.323,26.721) 17.374,26.67 18.257,26.67 21.429,29.842 U1.2@21.429,29.867 ; v1@17.377,26.775 ccw(c17.629,27.027) 17.629,26.67
  Bottom Layer w0.254: P1.1@-0.441,2.981 ccw(c-1.504,4.044) 0,4.044 ccw(c1.504,4.044) P1.1@0.441,2.981 ; P1.1@-0.261,2.801 ccw(c-0.891,3.431) 0,3.431 ccw(c0.891,3.431) P1.1@0.261,2.801 ; P1.1@0,2.54 0,16.256 10.414,26.67 17.272,26.67 v1(17.323,26.721) ; 17.016,26.67 ccw(c17.016,27.027) v1@17.269,26.775
FSMC_A20: P1.4 U1.3 | length 47.1
  Top Layer w0.254: v1(18.034,25.908) 18.177,25.908 U1.3@21.782,29.513 ; v1@18.034,25.984 ccw(c18.034,26.514) 18.409,26.139
  Bottom Layer w0.254: P1.4@1.917,0 ccw(c0.413,0) 1.476,1.064 ccw(c2.54,2.127) P1.4@2.54,0.623 ; P1.4@2.171,0 ccw(c1.28,0) 1.91,0.63 ccw(c2.54,1.26) P1.4@2.54,0.369 ; P1.4@2.54,0 1.27,1.27 1.27,16.51 10.668,25.908 v1(18.034,25.908)
FSMC_A21: P1.3 U1.4 | length 42.7
  Top Layer w0.254: v1(17.78,25.146) 18.129,25.146 22.136,29.153 U1.4@22.136,29.159
  Bottom Layer w0.254: P1.3@2.099,2.981 ccw(c1.036,4.044) 2.54,4.044 ccw(c4.044,4.044) P1.3@2.981,2.981 ; P1.3@2.279,2.801 ccw(c1.649,3.431) 2.54,3.431 ccw(c3.431,3.431) P1.3@2.801,2.801 ; P1.3@2.54,2.54 2.54,16.764 10.922,25.146 v1(17.78,25.146)
FSMC_A22: P1.6 U1.5 | length 45
  Top Layer w0.254: v1(17.526,24.384) 18.068,24.384 U1.5@22.489,28.806
  Bottom Layer w0.254: P1.6@4.457,0 ccw(c2.953,0) 4.016,1.064 ccw(c5.08,2.127) P1.6@5.08,0.623 ; P1.6@4.711,0 ccw(c3.82,0) 4.45,0.63 ccw(c5.08,1.26) P1.6@5.08,0.369 ; P1.6@5.08,0 3.81,1.27 3.81,17.244 10.95,24.384 v1(17.526,24.384)
FSMC_A23: P1.2 U1.1 | length 48.7
  Top Layer w0.254: v1(17.196,27.686) 18.541,27.686 U1.1@21.075,30.22
  Bottom Layer w0.254: P1.2@-0.623,0 ccw(c-2.127,0) -1.064,1.064 ccw(c0,2.127) P1.2@0,0.623 ; P1.2@-0.369,0 ccw(c-1.26,0) -0.63,0.63 ccw(c0,1.26) P1.2@0,0.369 ; P1.2@0,0 -1.422,1.422 -1.422,15.85 10.414,27.686 v1(17.196,27.686)
FSMC_A24: P2.15 U1.128 | length 32.8
  Top Layer w0.254: v1(22.352,40.894) 22.352,40.64 22.628,40.364 25.781,40.364 U1.128@26.732,39.412 ; v1@22.423,40.866 ccw(c22.749,40.738) 22.501,40.491
  Bottom Layer w0.254: P2.15@17.78,61.917 cw(c17.78,60.413) 18.844,61.476 cw(c19.907,62.54) P2.15@18.403,62.54 ; P2.15@17.78,62.171 cw(c17.78,61.28) 18.41,61.91 cw(c19.04,62.54) P2.15@18.149,62.54 ; P2.15@17.78,62.54 19.05,61.27 19.05,58.73 20.32,57.46 20.32,42.926 v1(22.352,40.894)
FSMC_A25: P2.16 U1.129 | length 30.4
  Top Layer w0.254: v1(21.844,39.878) 25.559,39.878 U1.129@26.379,39.059
  Bottom Layer w0.254: P2.16@17.339,59.559 cw(c16.276,58.496) 17.78,58.496 cw(c19.284,58.496) P2.16@18.221,59.559 ; P2.16@17.519,59.739 cw(c16.889,59.109) 17.78,59.109 cw(c18.671,59.109) P2.16@18.041,59.739 ; P2.16@17.78,60 17.78,57.658 19.812,55.626 19.812,42.418 21.844,40.386 v1(21.844,39.878)
FSMC_CD: P1.17 U1.21 | length 37.2
  Top Layer w0.254: U1.21@28.146,23.149 30.905,25.908 v1(30.988,25.908) ; 30.717,25.719 cw(c30.988,25.448) v1@30.988,25.832
  Bottom Layer w0.254: P1.17@19.879,2.981 ccw(c18.816,4.044) 20.32,4.044 ccw(c21.824,4.044) P1.17@20.761,2.981 ; P1.17@20.059,2.801 ccw(c19.429,3.431) 20.32,3.431 ccw(c21.211,3.431) P1.17@20.581,2.801 ; P1.17@20.32,2.54 20.32,5.588 21.336,6.604 23.622,6.604 27.483,10.465 27.483,17.323 29.972,19.812 29.972,24.892 v1(30.988,25.908)
FSMC_CLK: P2.28 U1.117 | length 24.1
  Top Layer w0.254: v1(27.432,47.244) 27.432,46.491 U1.117@30.621,43.302
  Bottom Layer w0.254: v1(27.432,47.244) 27.432,48.336 33.02,53.924 P2.28@33.02,60 ; P2.28@32.579,59.559 cw(c31.516,58.496) 33.02,58.496 cw(c34.524,58.496) P2.28@33.461,59.559 ; P2.28@32.759,59.739 cw(c32.129,59.109) 33.02,59.109 cw(c33.911,59.109) P2.28@33.281,59.739
FSMC_D0: P2.49 U1.85 | length 40.2
  Top Layer w0.254: U1.85@45.117,37.998 47.498,40.379 47.498,41.402 v1(47.752,41.656)
  Bottom Layer w0.254: v1(47.752,41.656) 53.594,41.656 56.388,44.45 56.388,53.086 59.973,56.671 61.497,56.671 62.23,57.404 62.23,61.27 P2.49@60.96,62.54 ; P2.49@60.96,61.917 cw(c60.96,60.413) 62.024,61.476 cw(c63.087,62.54) P2.49@61.583,62.54 ; P2.49@60.96,62.171 cw(c60.96,61.28) 61.59,61.91 cw(c62.22,62.54) P2.49@61.329,62.54
FSMC_D1: P2.50 U1.86 | length 35.7
  Top Layer w0.254: U1.86@44.763,38.352 46.99,40.579 46.99,41.91 47.498,42.418 v1(48.26,42.418)
  Bottom Layer w0.254: v1(48.26,42.418) 53.594,42.418 55.88,44.704 55.88,53.34 60.96,58.42 P2.50@60.96,60 ; P2.50@60.519,59.559 cw(c59.456,58.496) 60.96,58.496 cw(c62.464,58.496) P2.50@61.401,59.559 ; P2.50@60.699,59.739 cw(c60.069,59.109) 60.96,59.109 cw(c61.851,59.109) P2.50@61.221,59.739
FSMC_D2: P2.29 U1.114 | length 26.2
  Top Layer w0.254: v1(29.718,47.244) 29.718,46.326 U1.114@31.682,44.362
  Bottom Layer w0.254: v1(29.718,47.244) 29.718,47.934 36.83,55.046 36.83,61.27 P2.29@35.56,62.54 ; P2.29@35.56,61.917 cw(c35.56,60.413) 36.624,61.476 cw(c37.687,62.54) P2.29@36.183,62.54 ; P2.29@35.56,62.171 cw(c35.56,61.28) 36.19,61.91 cw(c36.82,62.54) P2.29@35.929,62.54
FSMC_D3: P2.30 U1.115 | length 23.5
  Top Layer w0.254: v1(28.956,46.736) 28.956,46.381 U1.115@31.328,44.009
  Bottom Layer w0.254: v1(28.956,46.736) 28.956,47.854 35.56,54.458 P2.30@35.56,60 ; P2.30@35.119,59.559 cw(c34.056,58.496) 35.56,58.496 cw(c37.064,58.496) P2.30@36.001,59.559 ; P2.30@35.299,59.739 cw(c34.669,59.109) 35.56,59.109 cw(c36.451,59.109) P2.30@35.821,59.739
FSMC_D4: P1.45 U1.58 | length 35.6
  Top Layer w0.254: U1.58@44.41,25.27 45.721,23.959 47.085,23.959 v1(48.641,22.403)
  Bottom Layer w0.254: v1(48.641,22.403) 55.372,15.672 55.372,3.048 P1.45@55.88,2.54 ; 55.372,3.431 ccw(c56.771,3.431) P1.45@55.782,2.442 ; 55.372,4.044 ccw(c57.384,4.044) P1.45@55.961,2.621 ; 55.372,4.657 ccw(c57.997,4.657) P1.45@56.141,2.801 ; 55.372,5.27 ccw(c58.61,5.27) P1.45@56.321,2.981
FSMC_D5: P1.48 U1.59 | length 36.1
  Top Layer w0.254: U1.59@44.763,25.624 45.946,24.441 47.409,24.441 v1(49.454,22.397)
  Bottom Layer w0.254: v1@49.454,22.321 cw(c49.454,22.061) 49.638,22.244 ; v1(49.454,22.397) 49.485,22.397 56.642,15.24 56.642,5.334 57.15,4.826 57.15,1.27 P1.48@58.42,0 ; P1.48@57.797,0 ccw(c56.293,0) 57.356,1.064 ccw(c58.42,2.127) P1.48@58.42,0.623 ; P1.48@58.051,0 ccw(c57.16,0) 57.79,0.63 ccw(c58.42,1.26) P1.48@58.42,0.369
FSMC_D6: P1.47 U1.60 | length 33
  Top Layer w0.254: U1.60@45.117,25.977 46.17,24.924 47.609,24.924 48.53,24.003 49.098,24.003 50.343,22.758 v1(50.343,22.377)
  Bottom Layer w0.254: v1(50.343,22.377) 51.918,22.377 59.436,14.859 59.436,4.572 58.42,3.556 ; P1.47@58.137,3.095 ccw(c57.903,3.556) 58.42,3.556 ; P1.47@58.42,2.54 58.42,3.556 ; P1.47@58.703,3.095 cw(c58.937,3.556) 58.42,3.556
FSMC_D7: P1.50 U1.63 | length 39.5
  Top Layer w0.254: U1.63@46.177,27.038 48.425,24.79 51.286,24.79 53.217,22.86 v1(53.34,22.86) ; 53,23.077 ccw(c53.34,23.418) v1@53.34,22.936
  Bottom Layer w0.254: v1(53.34,22.86) 60.198,16.002 60.198,3.81 59.69,3.302 59.69,1.27 P1.50@60.96,0 ; P1.50@60.337,0 ccw(c58.833,0) 59.896,1.064 ccw(c60.96,2.127) P1.50@60.96,0.623 ; P1.50@60.591,0 ccw(c59.7,0) 60.33,0.63 ccw(c60.96,1.26) P1.50@60.96,0.369